# Altium PCB FOB - upper.PcbDoc
Units mm, origin at the board's own origin, x right, y up, seen from the top; angles counter-clockwise.
Board outline 54.5 x 27.5 mm, 2 copper layers (Top Layer, Bottom Layer); 24 components, 55 nets, 96 pads, 95 vias.
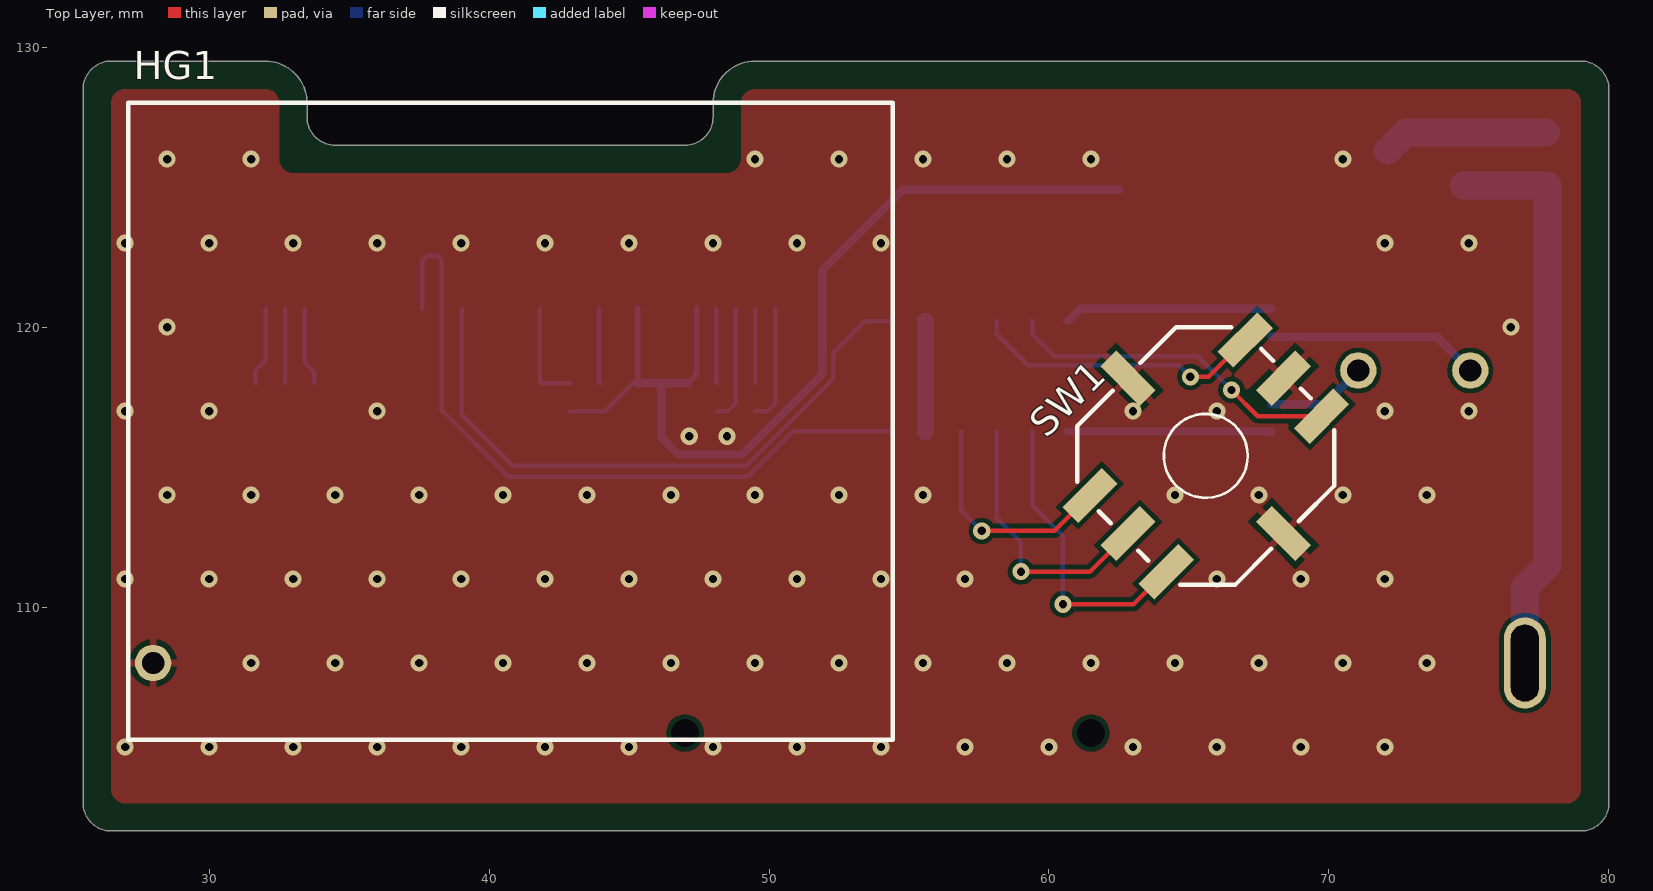
[diagram p0: Top Layer view]
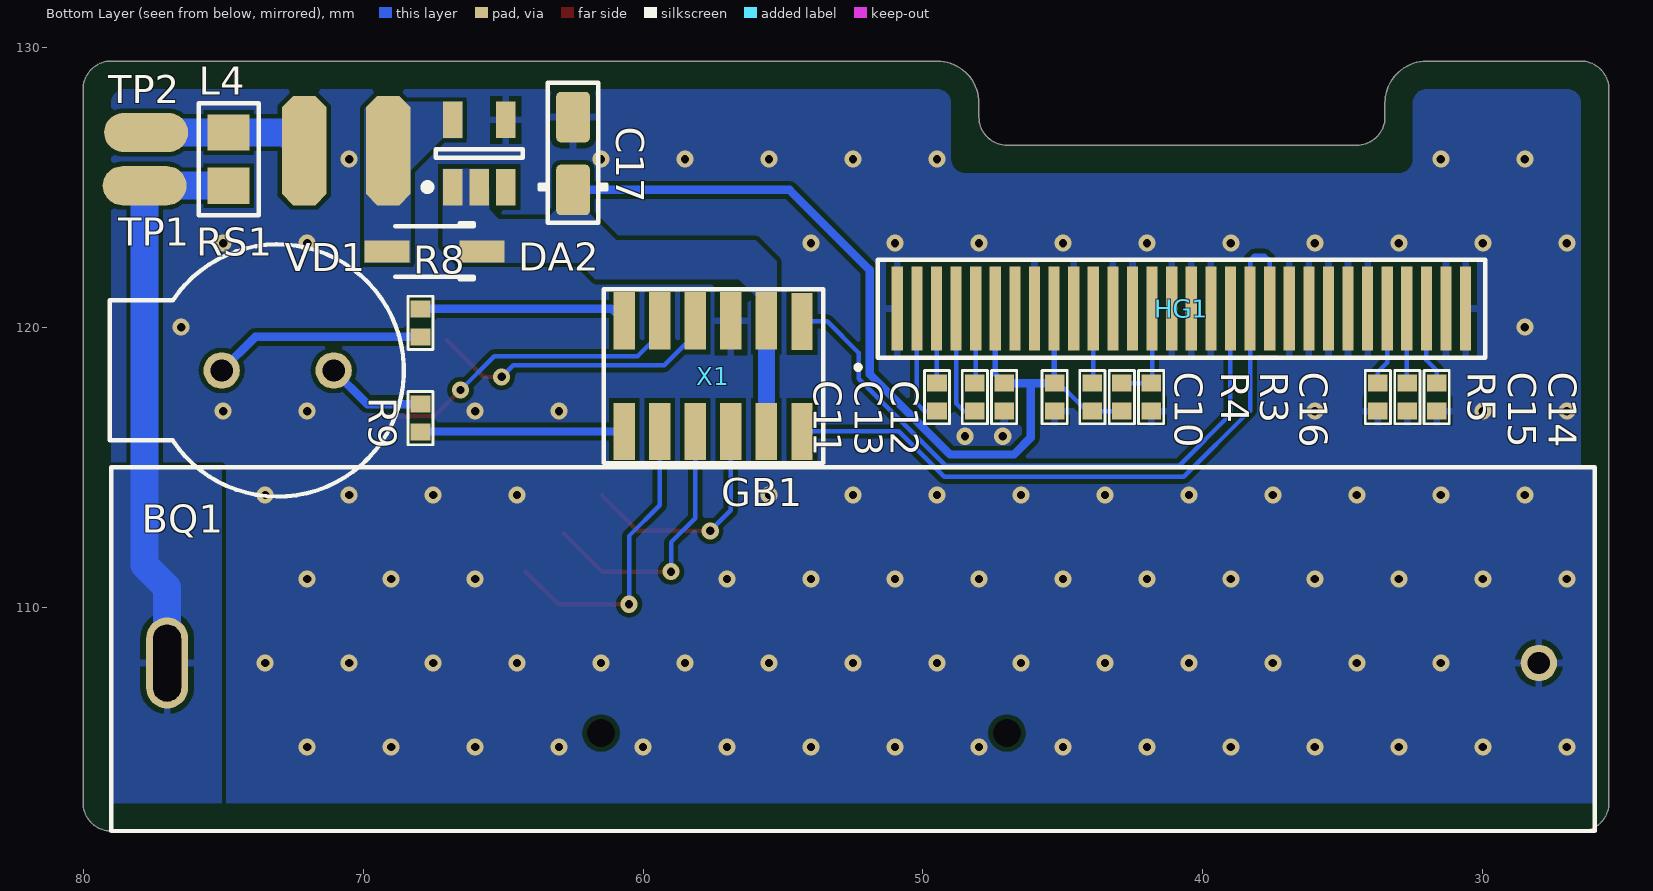
[diagram p1: Bottom Layer view, seen from below]
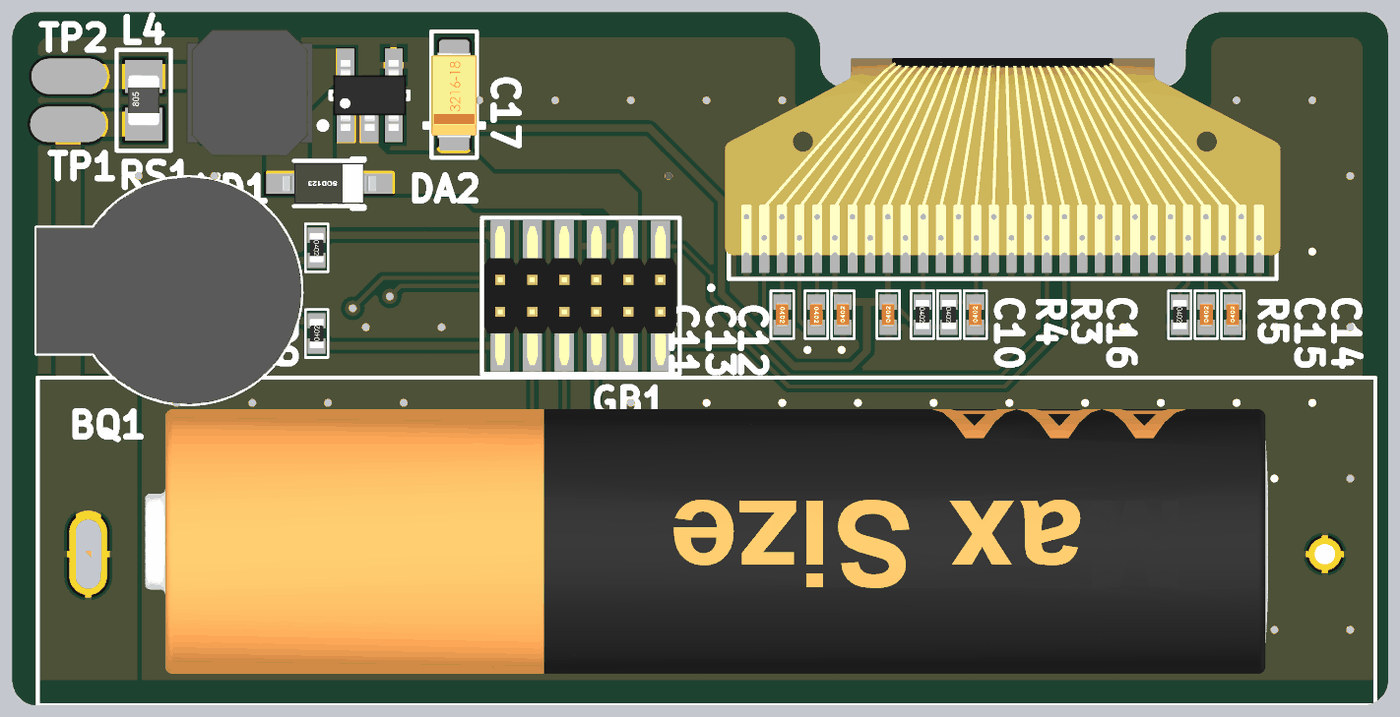
[diagram p2: 3D render of the assembled board from below, using the file's embedded part models]

## Layer stack, top to bottom
Top Solder: solder mask 0.0102, Solder Resist, Dk 3.5
Top Layer: signal copper 0.0356
Dielectric 1: dielectric 0.32, FR-4, Dk 4.8
Bottom Layer: signal copper 0.0356
Bottom Solder: solder mask 0.0102, Solder Resist, Dk 3.5

## Board outline
26.5,102 cw(c26.5,103) 25.5,103 25.5,128.5 cw(c26.5,128.5) 26.5,129.5 32,129.5 cw(c32,128) 33.5,128 33.5,127.5 ccw(c34.5,127.5) 34.5,126.5 47,126.5 ccw(c47,127.5) 48,127.5 48,128 cw(c49.5,128) 49.5,129.5 79,129.5 cw(c79,128.5) 80,128.5 80,103 cw(c79,103) 79,102

## Design rules (kind name [scope] priority, off if disabled: settings)
Clearance [All] p1: gap=0.16
PolygonConnect PolygonConnect_Direct [((InComponent('DA1') and HasRoundHole) or IsVia) or InNet('SW')or InNet('VCC1')] p1: connectstyle=Direct reliefconductorwidth=0.254 reliefentries=4 polygonreliefangle="90 Angle" airgapwidth=0.254
PolygonConnect [All] p2: connectstyle=Relief reliefconductorwidth=0.254 reliefentries=4 polygonreliefangle="90 Angle" airgapwidth=0.2
RoutingVias [All] p1: holewidth=0.3 width=0.61 viastyle="Through Hole" minholewidth=0.3 minwidth=0.61 maxholewidth=1 maxwidth=1.5
ShortCircuit ShortCircuit_1 [InNet('NetC5_1') vs InNet('GND2')] p1: allowed=TRUE
ShortCircuit [All] p2: allowed=FALSE
SolderMaskExpansion [All] p1: expansion=0.102
Width [All] p1: maxlimit=3 minlimit=0.16 preferedwidth=0.16 minimp=50.000000 maximp=50.000000 favimp=50.000000
29 further rules are at their usual default settings.

## Classes and differential pairs
component class FOB: R8 R9 X1
component class U_Power: C17 DA2 GB1 L4 RS1 TP1 TP2 VD1
component class "U_Btn and beeper": BQ1 SW1
component class U_Radio: L1 L2 L3
component class U_Display: C10 C11 C12 C13 C14 C15 C16 HG1 R3 R4 R5

## Components (designator, comment, footprint, x,y, rotation, side; value= is the part's Value field where it differs from the comment)
BQ1 "TFM-25B" CST-931RP-A 73.05,118.45 r270 bottom
C10 "Конденсатор" CHIP_0402_C 45.3,117.5 r90 bottom
C11 "Конденсатор" CHIP_0402_C 49.5,117.5 r270 bottom
C12 "Конденсатор" CHIP_0402_C 47.1,117.5 r90 bottom
C13 "Конденсатор" CHIP_0402_C 48.15,117.5 r270 bottom
C14 "Конденсатор" CHIP_0402_C 31.65,117.5 r90 bottom
C15 "Конденсатор" CHIP_0402_C 32.7,117.5 r90 bottom
C16 "Конденсатор" CHIP_0402_C 41.85,117.5 r90 bottom
C17 "33uF" CAP_TYPE_A 62.5,126.2 r90 bottom
DA2 "NCP1400A" SOT23-5 65.85,126.2 r90 bottom
GB1 "Battery" "AAA Holder_1" 52.5,108.5 r0 bottom
HG1 "OLED 0,96" "OLED 0.96" 40.767,115.062 r180 top locked
L4 "Value" SRN5040 70.6,126.3 r270 bottom
R3 "Резистор" CHIP_0402_R 42.9,117.5 r270 bottom
R4 "Резистор" CHIP_0402_R 43.95,117.5 r270 bottom
R5 "Резистор" CHIP_0402_R 33.75,117.5 r270 bottom
R8 "Резистор" CHIP_0402_R 67.95,120.15 r270 bottom
R9 "Резистор" CHIP_0402_R 67.95,116.75 r90 bottom
RS1 "Резистор" CHIP_0805_R 74.8,126 r90 bottom
SW1 "Joystick" jOYSTICK_sam 65.6,115.4 r270 top
TP1 "TEST_POINT" Pad_1 77.8,125.05 r0 bottom
TP2 "TEST_POINT" Pad_1 77.75,126.95 r0 bottom
VD1 "STPS0520Z" SOD123 67.45,122.7 r0 bottom
X1 "PLD-12" "PLD1.27-12 SMD" 57.5,118.245 r0 bottom

## Footprints (in the part's own frame and the unit in brackets; to place one, negate y for a bottom-side part, rotate by r counter-clockwise, add the part's x,y. Pads: shape width x height; smd on the part's side, far side on the other; paste and mask are expansions set on the pad)
"AAA Holder_1" [mm]
  oval 1.5x3.25 hole 1 slot 2.75 at 90 deg: +(24.5,0.5)
  round 1.3 hole 0.8: -(-24.5,0.5)
  round 0 hole 1 unplated paste+0 mask+0: MH(-5.5,3) MH(9,3)
  silkscreen extent -26.5,-6.5 26.5,6.5, body extent -22.25,-5.25 22.25,5.25, height 11.25
CAP_TYPE_A [mm] "Capacitor, polarized, Molded Body, EIA 535BAAC size A; 3.20mm L X 1.60mm W X 1.80mm H"
  round 0.508 on Mech14: 0(0,0)
  rrect25% 1.8x1.2 smd: 1(-1.3,0) 2(1.3,0)
  silkscreen extent -2.47,-1.2 2.52,1.2, body extent -1.7,-0.9 1.7,0.9, height 1.8
CHIP_0402_C [mm]
  rect 0.6x0.7 smd paste+0 mask+0: 1(-0.5,0) 2(0.5,0)
  silkscreen extent -0.95,-0.45 0.95,0.45, body extent -0.51,-0.25 0.51,0.25, height 0.51
CHIP_0402_R [mm]
  rect 0.6x0.7 smd paste+0 mask+0: 1(-0.5,0) 2(0.5,0)
  silkscreen extent -0.95,-0.45 0.95,0.45, body extent -0.58,-0.27 0.57,0.28, height 0.41
CHIP_0805_R [mm]
  rect 1.3x1.5 smd: 1(-0.95,0) 2(0.95,0)
  silkscreen extent -2,-1.07 2,1.07, body extent -1,-0.63 1,0.63, height 0.78
CST-931RP-A [mm]
  round 1.3 hole 0.8 paste+0 mask+0: 1(0,2) 2(0,-2)
  silkscreen extent -4.51,-6 4.51,4.5, body extent -4.5,-6 4.5,4.5, height 4.5
jOYSTICK_sam [mm]
  rect 0.8x2 smd rot 45: 1(-1.414,4.137) 2(1.414,-4.137) 3(-4.137,1.414) 4(4.137,-1.414) 5(2.775,-2.775) 6(-2.775,2.775)
  rect 0.8x2 smd rot 135: 6(-2.775,-2.775) 6(2.775,2.775)
  silkscreen extent -4.6,-4.6 4.6,4.6
"OLED 0.96" [mm]
  rect 0.4x3 smd far side paste+0 mask+0: 1(-10.15,-5.6) 2(-9.45,-5.6) 3(-8.75,-5.6) 4(-8.05,-5.6) 5(-7.35,-5.6) 6(-6.65,-5.6) 7(-5.95,-5.6) 8(-5.25,-5.6) 9(-4.55,-5.6) 10(-3.85,-5.6) 11(-3.15,-5.6) 12(-2.45,-5.6) 13(-1.75,-5.6) 14(-1.05,-5.6) 15(-0.35,-5.6) 16(0.35,-5.6) 17(1.05,-5.6) 18(1.75,-5.6) 19(2.45,-5.6) 20(3.15,-5.6) 21(3.85,-5.6) 22(4.55,-5.6) 23(5.25,-5.6) 24(5.95,-5.6) 25(6.65,-5.6) 26(7.35,-5.6) 27(8.05,-5.6) 28(8.75,-5.6) 29(9.45,-5.6) 30(10.15,-5.6)
  silkscreen extent -13.65,-12.95 13.65,9.8, body extent -13.35,-12.62 13.35,9.6, height 3.12
Pad_1 [mm]
  oval 3x1.4 smd paste+0 mask+0.1: 1(0,0)
"PLD1.27-12 SMD" [mm]
  rect 0.76x2.05 smd paste+0 mask+0: 1(-3.175,-1.955) 2(-3.175,1.975) 3(-1.905,-1.975) 4(-1.905,1.975) 5(-0.635,-1.975) 6(-0.635,1.975) 7(0.635,-1.975) 8(0.635,1.975) 9(1.905,-1.975) 10(1.905,1.975) 11(3.175,-1.975) 12(3.175,1.975)
  silkscreen extent -3.94,-3.1 3.9,3.1, body extent -3.81,-2.75 3.81,2.75, height 6.41
SOD123 [mm] "по IPC-SM-782A"
  rect 1.6x0.8 smd: A(1.7,0) K(-1.7,0)
  silkscreen extent -1.4,-1 1.4,1, body extent -1.85,-0.8 1.85,0.8, height 1.27
SOT23-5 [mm] "SOT23, 5-Leads, Body 2.9x1.7mm, Pitch 0.95mm, Lead Span 2.8mm, IPC Low Density"
  rect 1.3x0.7 smd mask+0.05: 1(-1.2,0.95) 2(-1.2,0) 3(-1.2,-0.95) 4(1.2,-0.95) 5(1.2,0.95)
  silkscreen extent -1.32,-1.55 0.15,1.98, body extent -1.4,-1.45 1.4,1.45, height 1.45
SRN5040 [mm] "Inductor, SMD"
  oct 3.9x1.6 smd: 1(0,-1.5) 2(0,1.5)
  body extent -2.5,-2.5 2.5,2.5, height 4

## Part data
BQ1: library part "Пьезоизлучатель TFM-25B"
C17: library part C_POL, "Конденсатор полярный"
DA2: "PSIC, Low-Power Step-Up Converter"
HG1: "OLED, Serial, 0.96\""
L4: library part Ind_core, "Дроссель с сердечником"
SW1: "Joystick, 4-dir+push"
VD1: library part Diode, "Диод"

## Via types
v1: diameter 0.61, hole 0.3, Top Layer to Bottom Layer, tented both sides, 95 vias

## Nets (pads, with @x,y where several pads share a name; then routed paths per layer and width w, separated by ;. In a path a pad name is that pad's centre, name@x,y a point inside that pad or via, vN(x,y) a via of type N, cw(c..) or ccw(c..) an arc to the next point about the centre after c; other vN are vias at no path point)
ANT1: 
ANT2: 
GND1: C10.1 C12.1 C14.1 C15.1 C16.1 C17.2 DA2.4 GB1.- HG1.1 HG1.8 HG1.10 HG1.12 HG1.13 HG1.15 HG1.16 HG1.17 HG1.21 HG1.22 HG1.23 HG1.24 HG1.25 HG1.29 HG1.30 R5.2 SW1.6 X1.5
  other v1: 27,105 30,105 33,105 36,105 39,105 42,105 45,105 48,105 51,105 54,105 57,105 60,105 63,105 66,105 69,105 72,105 31.5,108 34.5,108 37.5,108 40.5,108 43.5,108 46.5,108 49.5,108 52.5,108 55.5,108 58.5,108 61.5,108 64.5,108 67.5,108 70.5,108 73.5,108 27,111 30,111 33,111 36,111 39,111 42,111 45,111 48,111 51,111 54,111 57,111 66,111 69,111 72,111 28.5,114 31.5,114 34.5,114 37.5,114 40.5,114 43.5,114 46.5,114 49.5,114 52.5,114 55.5,114 64.5,114 67.5,114 70.5,114 73.5,114 47.15,116.1 48.5,116.1 27,117 30,117 36,117 63,117 66,117 72,117 75,117 28.5,120 76.5,120 27,123 30,123 33,123 36,123 39,123 42,123 45,123 48,123 51,123 54,123 72,123 75,123 28.5,126 31.5,126 49.5,126 52.5,126 55.5,126 58.5,126 61.5,126 70.5,126
GND2: 
NetBQ1_1: BQ1.1 R9.2 | length 3.6
  Bottom Layer w0.3: R9.2 69.85,117.25 BQ1.1
NetBQ1_2: BQ1.2 R8.2 | length 7.6
  Bottom Layer w0.3: R8.2 73.85,119.65 BQ1.2
NetC3_2: 
NetC5_1: 
NetC5_2: 
NetC7_2: 
NetC11_1: C11.1 HG1.3 | length 2.7
  Bottom Layer w0.16: C11.1 49.5,120.645 HG1.3
NetC11_2: C11.2 HG1.2 | length 4.2
  Bottom Layer w0.16: C11.2 49.95,117 50.217,117.267 HG1.2
NetC13_1: C13.1 HG1.5 | length 2.7
  Bottom Layer w0.16: HG1.5 48.117,118.033 C13.1
NetC13_2: C13.2 HG1.4 | length 4.2
  Bottom Layer w0.16: C13.2 48.55,117 48.817,117.267 HG1.4
NetC14_2: C14.2 HG1.28 | length 2.8
  Bottom Layer w0.16: C14.2 31.65,118.45 32.017,118.817 HG1.28
NetC15_2: C15.2 HG1.27 | length 2.7
  Bottom Layer w0.16: C15.2 32.717,118.017 HG1.27
NetC16_2: C16.2 HG1.14 R3.1 | length 3.7
  Bottom Layer w0.16: HG1.14 41.817,118.033 C16.2 R3.1
NetDD1_6: 
NetDD1_7: 
NetDD1_8: 
NetDD1_9: 
NetDD1_18: 
NetDD1_19: 
NetDD1_31: 
NetGB1_+: GB1.+ RS1.1 TP1.1 | length 20.4
  Bottom Layer w1: RS1.1 TP1.1 77.8,111.5 77,110.7 GB1.+
NetHG1_11: HG1.11 R4.1 | length 2.7
  Bottom Layer w0.16: HG1.11 43.917,118.033 R4.1
NetHG1_18: HG1.18 X1.1 | length 22.5
  Bottom Layer w0.16: HG1.18 39.017,116.883 40.85,115.05 49.19,115.05 52.296,118.156 52.296,119.076 53.425,120.205 54.32,120.205 X1.1
NetHG1_19: HG1.19 HG1.20 X1.2 | length 25.6
  Bottom Layer w0.16: HG1.20 37.617,122.367 37.8,122.55 38.162,122.55 38.317,122.395 HG1.19 38.317,117.017 40.684,114.65 49.242,114.65 50.867,116.275 54.32,116.275 X1.2
NetHG1_26: HG1.26 R5.1 | length 2.8
  Bottom Layer w0.16: HG1.26 33.417,118.733 33.75,118.4 R5.1
NetR8_1: R8.1 X1.11 | length 7.5
  Bottom Layer w0.3: X1.11 61.105,120.65 R8.1
NetR9_1: R9.1 X1.12 | length 7.3
  Bottom Layer w0.3: X1.12 67.93,116.27 R9.1
NRST: 
PUSH: 
RADIO_CE: 
RADIO_IREF: 
RADIO_IRQ: 
RADIO_MISO: 
RADIO_MOSI: 
RADIO_NCS: 
RADIO_SCK: 
SCL: 
SDA: 
SW: DA2.5 L4.2 VD1.A
SW_DN: SW1.2 X1.6 | length 8.2
  Top Layer w0.16: v1(57.6,112.723) 60.201,112.723 SW1.2
  Bottom Layer w0.16: X1.6 56.865,113.458 v1(57.6,112.723)
SW_L: SW1.3 X1.7 | length 10.5
  Top Layer w0.16: v1(65.05,118.223) 65.701,118.223 SW1.3
  Bottom Layer w0.16: X1.7 58.135,119.746 59.246,118.635 64.638,118.635 v1(65.05,118.223)
SW_PUSH: SW1.5 X1.8 | length 9.8
  Top Layer w0.16: v1(59,111.263) 61.463,111.263 SW1.5
  Bottom Layer w0.16: X1.8 58.135,113.174 59,112.309 v1(59,111.263)
SW_R: SW1.4 X1.10 | length 10.8
  Top Layer w0.16: v1(60.5,110.1) 63.022,110.1 SW1.4
  Bottom Layer w0.16: X1.10 59.405,113.632 60.5,112.537 v1(60.5,110.1)
SW_UP: SW1.1 X1.9 | length 12
  Top Layer w0.16: v1(66.519,117.751) 67.456,116.814 SW1.1
  Bottom Layer w0.16: X1.9 59.405,119.746 60.196,118.955 65.315,118.955 v1(66.519,117.751)
SWCLK: 
SWDIO: 
VBAT: L4.1 RS1.2 TP2.1 | length 5.9
  Bottom Layer w1: L4.1 72.75,126.95 RS1.2 TP2.1
VCC1: C10.2 C12.2 C17.1 DA2.1 DA2.2 HG1.6 HG1.9 R3.2 R4.2 VD1.K X1.3 X1.4 | length 38.7
  Bottom Layer w0.16: R3.2 R4.2 44.15,117 C10.2@45.15,118
  Bottom Layer w0.2: C10.2@45.15,118 C10.2 45.317,118.017 HG1.9 ; C12.2 47.417,118.317 HG1.6
  Bottom Layer w0.3: C10.2 46.15,118 ; C12.2 46.15,118 ; C17.1 54.764,124.9 51.906,122.041 51.906,118.317 49.038,115.45 46.749,115.45 46.15,116.049 46.15,118
  Bottom Layer w0.6: X1.4 X1.3
VCC2: 
XC1: 
XC2: 
pads on no net: C17.0 DA2.3 GB1.MH HG1.7

## Polygon pours and split planes (outlines as drawn)
GND1 on Top Layer "GND1" (solid, pour order 12): 27,103 cw(c27,103.5) 26.5,103.5 26.5,128 cw(c27,128) 27,128.5 32,128.5 cw(c32,128) 32.5,128 32.5,126 ccw(c33,126) 33,125.5 48.5,125.5 ccw(c48.5,126) 49,126 49,128 cw(c49.5,128) 49.5,128.5 78.5,128.5 cw(c78.5,128) 79,128 79,103.5 cw(c78.5,103.5) 78.5,103
GND1 on Bottom Layer "GND1" (solid, pour order 14): 27,103 cw(c27,103.5) 26.5,103.5 26.5,128 cw(c27,128) 27,128.5 32,128.5 cw(c32,128) 32.5,128 32.5,126 ccw(c33,126) 33,125.5 48.5,125.5 ccw(c48.5,126) 49,126 49,128 cw(c49.5,128) 49.5,128.5 78.5,128.5 cw(c78.5,128) 79,128 79,103.5 cw(c78.5,103.5) 78.5,103
SW on Bottom Layer "NetDA2_5" (solid, pour order 4): 66.45,126.75 67.15,126.75 68.3,125.6 68.3,122.3 69.95,122.3 69.95,127.8 69.5,128.25 68.707,128.25 68.507,128.05 66.45,128.05
VCC1 on Bottom Layer "VCC1" (solid, pour order 6): 61.9,124.55 61.9,124.05 60.952,123.102 55.975,123.102 55.225,122.352 55.225,121.098 55.975,121.098 56.577,121.7 61.7,121.7 62.3,122.3 66.55,122.3 67.15,122.9 67.15,125.65 65.504,125.65 65.5,124.2 65.15,123.85 63.45,123.85 63.1,124.2 63.1,124.55
NetGB1_+ on Bottom Layer "GB_PLUS" (solid, pour order 8): 75.05,103 75.05,115 79,115 79,103
GND1 on Bottom Layer "GND1_1" (solid, pour order 10): 26.05,103 26.05,115 30,115 30,103

## Silkscreen, mask and mechanical layers (free items; w line width, h text height)
Mechanical 4:
  lines w0.05: 25.5,161.996 25.5,162.504 ; 27.024,161.742 25.5,162.25 ; 27.024,162.758 25.5,162.25 ; 46.25,162.25 25.5,162.25 ; 59.25,162.25 80,162.25 ; 78.476,161.742 80,162.25 ; 78.476,162.758 80,162.25 ; 80,161.996 80,162.504 ; 86.492,103.524 87,102 ; 86.492,146.576 87,148.1 ; 86.746,102 87.254,102 ; 86.746,148.1 87.254,148.1 ; 87,118.677 87,102 ; 87,131.423 87,148.1 ; 87.508,103.524 87,102 ; 87.508,146.576 87,148.1
  lines w0.15: 25.5,103 ccw(c26.5,103) 26.5,102 ; 25.5,128.5 cw(c26.5,128.5) 26.5,129.5 32,129.5 ; 33.5,127.5 ccw(c34.5,127.5) 34.5,126.5 ; 33.5,128 ccw(c32,128) 32,129.5 ; 47,126.5 ccw(c47,127.5) 48,127.5 ; 48,128 cw(c49.5,128) 49.5,129.5 ; 79,102 ccw(c79,103) 80,103 ; 79,129.5 cw(c79,128.5) 80,128.5 ; 32,129.5 32,129.5
  lines w0.16: 25.5,103 25.5,128.5 ; 26.5,102 79,102 ; 33.5,127.5 33.5,128 ; 34.5,126.5 47,126.5 ; 48,127.5 48,128 ; 49.5,129.5 79,129.5 ; 80,103 80,128.5 ; 22.15,98.6 122.15,98.6 122.15,198.6 22.15,198.6 22.15,98.6
  text "54.5 (mm)" at 46.504,161.336 h1.52
  text "46.1 (mm)" at 87.914,118.931 h1.52 r90
Mechanical 14:
  lines w0.15: 53.565,121.35 53.565,129.5

## Text inside footprints (layer, text, board x,y; h text height)
VD1: Mechanical 3 "+" at 68.05,123.1 h0.8 r180